# EAGLE board CT_schematic (EAGLE 7.6.0)

Size 100 x 80 mm. Coordinates in mm from the lower left corner, seen from the top.
Outline: 0,0 100,0 100,80 0,80 0,0
Copper layers (1*16): Top 0.035mm / dielectric 1.5mm / Bottom 0.035mm
Design rules "default": minimum track width 10mil, minimum drill 24mil, track to track 8mil, track to pad 8mil, pad to pad 8mil, via to via 8mil, smd to smd 8mil, copper to edge 40mil, drill to drill 8mil, minimum pad ring 10mil, minimum via ring 8mil, stop-mask expansion 4mil, vias tented up to drill 0mil, thermal gap 10mil

## Footprints (pad centres in the part's own frame; a part is rotated, then mirrored left to right if it is on the bottom)
C0603 = smd 0.8 x 0.8: 1 -0.762,0; 2 0.762,0
C0402 = smd 0.5 x 0.5: 1 -0.508,0; 2 0.508,0
EXV-9B = smd 2.718 x 1.778: 1 -2.108,0; 2 2.108,0
EXV-9H = smd 3.505 x 1.676: 1 -2.857,0; 2 2.857,0
PJ-037B_PACKAGE = drill 3.7 square: 1 12,0 | drill 3.2 square: 2 6,0
R0603 = smd 0.8 x 0.8: 1 -0.762,0; 2 0.762,0
UFQFPN32 = smd 0.6 x 0.3: 1 -2.35,1.75; 2 -2.35,1.25; 3 -2.35,0.75; 4 -2.35,0.25; 5 -2.35,-0.25; 6 -2.35,-0.75; 7 -2.35,-1.25; 8 -2.35,-1.75; 17 2.35,-1.75; 18 2.35,-1.25; 19 2.35,-0.75; 20 2.35,-0.25; 21 2.35,0.25; 22 2.35,0.75; 23 2.35,1.25; 24 2.35,1.75 | smd 0.3 x 0.6: 9 -1.75,-2.35; 10 -1.25,-2.35; 11 -0.75,-2.35; 12 -0.25,-2.35; 13 0.25,-2.35; 14 0.75,-2.35; 15 1.25,-2.35; 16 1.75,-2.35; 25 1.75,2.35; 26 1.25,2.35; 27 0.75,2.35; 28 0.25,2.35; 29 -0.25,2.35; 30 -0.75,2.35; 31 -1.25,2.35; 32 -1.75,2.35 | smd 3.45 x 3.45: EPAD 0,0
SOT-23-8 = smd 0.4 x 1.2: 1 -0.975,-1.3; 2 -0.325,-1.3; 3 0.325,-1.3; 4 0.975,-1.3; 5 0.975,1.3; 6 0.325,1.3; 7 -0.325,1.3; 8 -0.975,1.3
182-009-MALE = drill 1.194 pad 1.524 octagon: 1 -5.537,10.923; 2 -2.769,10.923; 3 0,10.923; 4 2.769,10.923; 5 5.537,10.923; 6 -4.153,8.08; 7 -1.384,8.08; 8 1.384,8.08; 9 4.153,8.08 | hole 3.048: -12.446,9.501; 12.446,9.501
WFDN-8 = smd 0.48 x 0.7: 1 0,0; 2 1.27,0; 3 2.54,0; 4 3.81,0; 5 3.81,4.45; 6 2.54,4.45; 7 1.27,4.45; 8 0,4.45 | smd 4 x 3: 9 1.89,2.25
ABS07-32.768KHZ-7-T = smd 1.1 x 2.4: 1 -2.5,0; 2 0,0
ASFL1 = smd 1.7 x 1.5: 1 -1.27,-1.1; 2 1.27,-1.1; 3 1.27,1.1; 4 -1.27,1.1
LP2954 = smd 1.6 x 0.6: 1 -2.475,1.905 | smd 1.55 x 0.6: 2 -2.475,0.635; 3 -2.475,-0.635; 4 -2.475,-1.905; 5 2.475,-1.905; 6 2.475,-0.635; 7 2.475,0.635; 8 2.475,1.905
SON-6 = smd 0.55 x 0.3: 1 -0.355,0.5 | smd 0.52 x 0.3: 2 -0.37,0; 3 -0.37,-0.5; 4 0.37,-0.5; 5 0.37,0; 6 0.37,0.5
SW_4-1437565-2 = smd 1.4 x 2.1: 1 -2.23,4.55; 2 -2.23,-4.55; 3 2.23,4.55; 4 2.23,-4.55
LGM67K-G1J2-24-Z = smd 0.8 x 1.4: A -2,0; C 0,0
NC7SZ125M5X = smd 1.3 x 0.7: 1 -1.3,0.95; 2 -1.3,0; 3 -1.3,-0.95; 4 1.3,-0.95; 5 1.3,0.95

## Placement (x,y rotation side)
C1  1e-07  [C0603]  -43.18,60.96 0 top  (outside the outline)
C2  1e-07  [C0603]  -46.99,60.96 0 top  (outside the outline)
C3  1e-07  [C0603]  -50.8,60.96 0 top  (outside the outline)
C4  1e-07  [C0603]  -54.61,60.96 0 top  (outside the outline)
C5  4.7e-06  [C0603]  -39.37,60.96 0 top  (outside the outline)
C6  1e-08  [C0603]  -58.42,60.96 0 top  (outside the outline)
C7  1e-06  [C0603]  -62.23,60.96 0 top  (outside the outline)
C8  1e-11  [C0402]  -30.48,66.04 0 top  (outside the outline)
C9  1e-11  [C0402]  -34.29,66.04 0 top  (outside the outline)
C10  1e-07  [C0402]  -38.1,66.04 0 top  (outside the outline)
C11  1e-07  [C0402]  -41.91,66.04 0 top  (outside the outline)
C12  1e-08  [C0402]  -45.72,66.04 0 top  (outside the outline)
C13  1e-06  [EXV-9B]  -53.34,46.99 0 top  (outside the outline)
C14  2.2e-06  [EXV-9B]  -62.23,46.99 0 top  (outside the outline)
C15  1e-07  [C0402]  -49.53,66.04 0 top  (outside the outline)
C16  0.0001  [EXV-9H]  -52.07,38.1 0 top  (outside the outline)
C17  0.0001  [EXV-9H]  -63.5,38.1 0 top  (outside the outline)
C18  1e-08  [C0402]  -53.34,66.04 0 top  (outside the outline)
J1  PJ-037B  [PJ-037B_PACKAGE]  -67.31,7.62 0 top  (outside the outline)
R1  10000.0  [R0603]  -20.32,60.96 0 top  (outside the outline)
R2  1000.0  [R0603]  -66.04,60.96 0 top  (outside the outline)
R3  1600.5  [R0603]  -15.24,66.04 0 top  (outside the outline)
R4  4700.0  [R0603]  -19.05,66.04 0 top  (outside the outline)
R5  10000.0  [R0603]  -25.4,60.96 0 top  (outside the outline)
R6  120.0  [R0603]  -22.86,66.04 0 top  (outside the outline)
R7  100000.0  [R0603]  -27.94,54.61 0 top  (outside the outline)
R8  100000.0  [R0603]  -33.02,54.61 0 top  (outside the outline)
R9  100000.0  [R0603]  -38.1,54.61 0 top  (outside the outline)
R10  100000.0  [R0603]  -43.18,54.61 0 top  (outside the outline)
R11  100000.0  [R0603]  -48.26,54.61 0 top  (outside the outline)
R12  100000.0  [R0603]  -53.34,54.61 0 top  (outside the outline)
R13  164658.62  [R0603]  -22.86,54.61 0 top  (outside the outline)
R14  100000.0  [R0603]  -58.42,54.61 0 top  (outside the outline)
R15  10000.0  [R0603]  -30.48,60.96 0 top  (outside the outline)
R16  10000.0  [R0603]  -35.56,60.96 0 top  (outside the outline)
R17  9100.0  [R0603]  -26.67,66.04 0 top  (outside the outline)
R18  680000.0  [R0603]  -63.5,54.61 0 top  (outside the outline)
R19  120000.0  [R0603]  -15.24,60.96 0 top  (outside the outline)
U1  STM32L442KCUx  [UFQFPN32]  -64.77,27.94 0 top  (outside the outline)
U2  MAX3051EKA+T  [SOT-23-8]  -46.99,46.99 0 top  (outside the outline)
U3  182-009-113R531  [182-009-MALE]  -36.83,6.35 0 top  (outside the outline)
U4  SST26VF016B-104I/MF  [WFDN-8]  -50.8,25.4 0 top  (outside the outline)
U5  ABS07-32.768KHZ-7-T  [ABS07-32.768KHZ-7-T]  -27.94,48.26 0 top  (outside the outline)
U6  ASFL1-12MHZ-NCS  [ASFL1]  -43.18,38.1 0 top  (outside the outline)
U7  LP2954AIMX/NOPB  [LP2954]  -25.4,39.37 0 top  (outside the outline)
U8  TPS3895ADRYR  [SON-6]  -55.88,64.77 0 top  (outside the outline)
U9  4-1437565-2  [SW_4-1437565-2]  -27.94,27.94 0 top  (outside the outline)
U10  Q65110A2395  [LGM67K-G1J2-24-Z]  -36.83,46.99 0 top  (outside the outline)
U11  nc7sz125m5x  [NC7SZ125M5X]  -15.24,54.61 0 top  (outside the outline)

## Library data of the parts
C1-C18 J1 R1-R19 U1-U11 = circuit_tree

## Nets
CLK_CRYSTAL_U1_2: C8.1 U1.2 U5.1
CLK_CRYSTAL_U1_3: C9.1 U1.3 U5.2
CLK_U1_6: U1.6 U6.3
GND: C1.2 C2.2 C3.2 C4.2 C5.2 C6.2 C7.2 C8.2 C9.2 C10.2 C11.2 C12.2 C13.2 C14.2 C15.2 C16.2 C17.2 C18.2 J1.2 R2.2 R5.2 R7.2 R14.2 R17.2 R19.2 U1.16 U1.32 U1.EPAD U2.2 U3.5 U4.4 U4.9 U6.2 U7.4 U8.2 U10.C U11.1 U11.3
NET_U1_4: R4.1 U1.4 U11.4
NET_U1_30: R3.1 U1.30 U10.A
NET_U1_31: R1.1 R5.1 U1.31 U9.3 U9.4
NET_U2_6: R6.2 U2.6
NET_U2_8: R7.1 U2.8
NET_U3_2: R6.2 U2.6 U3.2
NET_U3_3: R6.1 U2.7 U3.3
NET_U7_3: R12.1 U7.3
NET_U7_5: R11.1 U7.5
NET_U7_7: R13.2 R14.1 U7.7
NET_U8_1: R16.1 R17.1 U8.1
NET_U8_3: R18.2 R19.1 U8.3
NET_U8_4: R15.1 U8.4 U11.2
NET_U9_1: R2.1 U9.1 U9.2
PROC_CAN1_RX: U1.21 U2.4
PROC_CAN1_TX: U1.22 U2.1
PROC_QUADSPI_BK1_IO0: U1.15 U4.5
PROC_QUADSPI_BK1_IO1: U1.14 U4.2
PROC_QUADSPI_BK1_IO2: R9.1 U1.13 U4.3
PROC_QUADSPI_BK1_IO3: R10.1 U1.12 U4.7
PROC_QUADSPI_BK1_NCS: R8.1 U1.8 U4.1
PROC_QUADSPI_CLK: U1.9 U4.6
VCC_S1_8V1: C13.1 C16.1 C17.1 J1.1 R12.2 U7.8
VCC_TIER1_3V3: C1.1 C2.1 C3.1 C4.1 C5.1 C6.1 C7.1 C10.1 C11.1 C12.1 C14.1 C15.1 C18.1 R1.2 R3.2 R4.2 R8.2 R9.2 R10.2 R11.2 R13.1 R15.2 R16.2 R18.1 U1.1 U1.5 U1.17 U2.3 U4.8 U6.4 U7.1 U8.6 U11.5

## Tracks (layer width: path | path; a pad name or v marks a point on that pad's centre or on a via)
CLK_CRYSTAL_U1_2  (2 unrouted)
CLK_CRYSTAL_U1_3  (2 unrouted)
CLK_U1_6  (1 unrouted)
GND  (37 unrouted)
NET_U1_4  (2 unrouted)
NET_U1_30  (2 unrouted)
NET_U1_31  (4 unrouted)
NET_U2_6  (1 unrouted)
NET_U2_8  (1 unrouted)
NET_U3_2  (2 unrouted)
NET_U3_3  (2 unrouted)
NET_U7_3  (1 unrouted)
NET_U7_5  (1 unrouted)
NET_U7_7  (2 unrouted)
NET_U8_1  (2 unrouted)
NET_U8_3  (2 unrouted)
NET_U8_4  (2 unrouted)
NET_U9_1  (2 unrouted)
PROC_CAN1_RX  (1 unrouted)
PROC_CAN1_TX  (1 unrouted)
PROC_QUADSPI_BK1_IO0  (1 unrouted)
PROC_QUADSPI_BK1_IO1  (1 unrouted)
PROC_QUADSPI_BK1_IO2  (2 unrouted)
PROC_QUADSPI_BK1_IO3  (2 unrouted)
PROC_QUADSPI_BK1_NCS  (2 unrouted)
PROC_QUADSPI_CLK  (1 unrouted)
VCC_S1_8V1  (5 unrouted)
VCC_TIER1_3V3  (32 unrouted)